# Altium PCB stm32f042g6u6andf6u6.PcbDoc
Units mil, origin at the board's own origin, x right, y up, seen from the top; angles counter-clockwise.
Board outline 650 x 1500 mil, 2 copper layers (Top Layer, Bottom Layer); 22 components, 34 nets, 140 pads, 57 vias.
Unrouted connection lines stored in the file: 1.
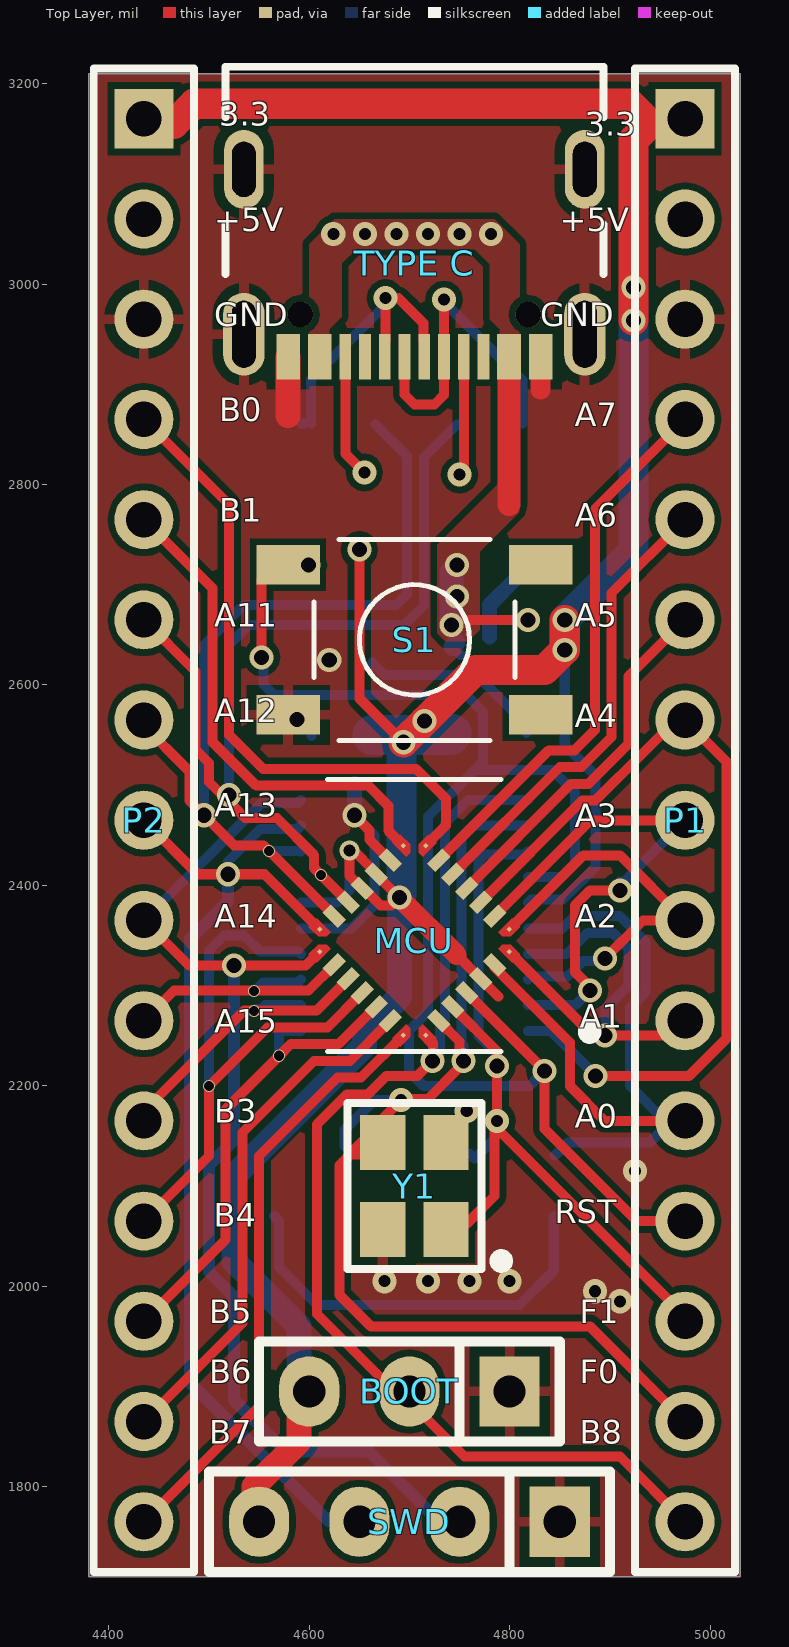
[diagram p0: Top Layer view]
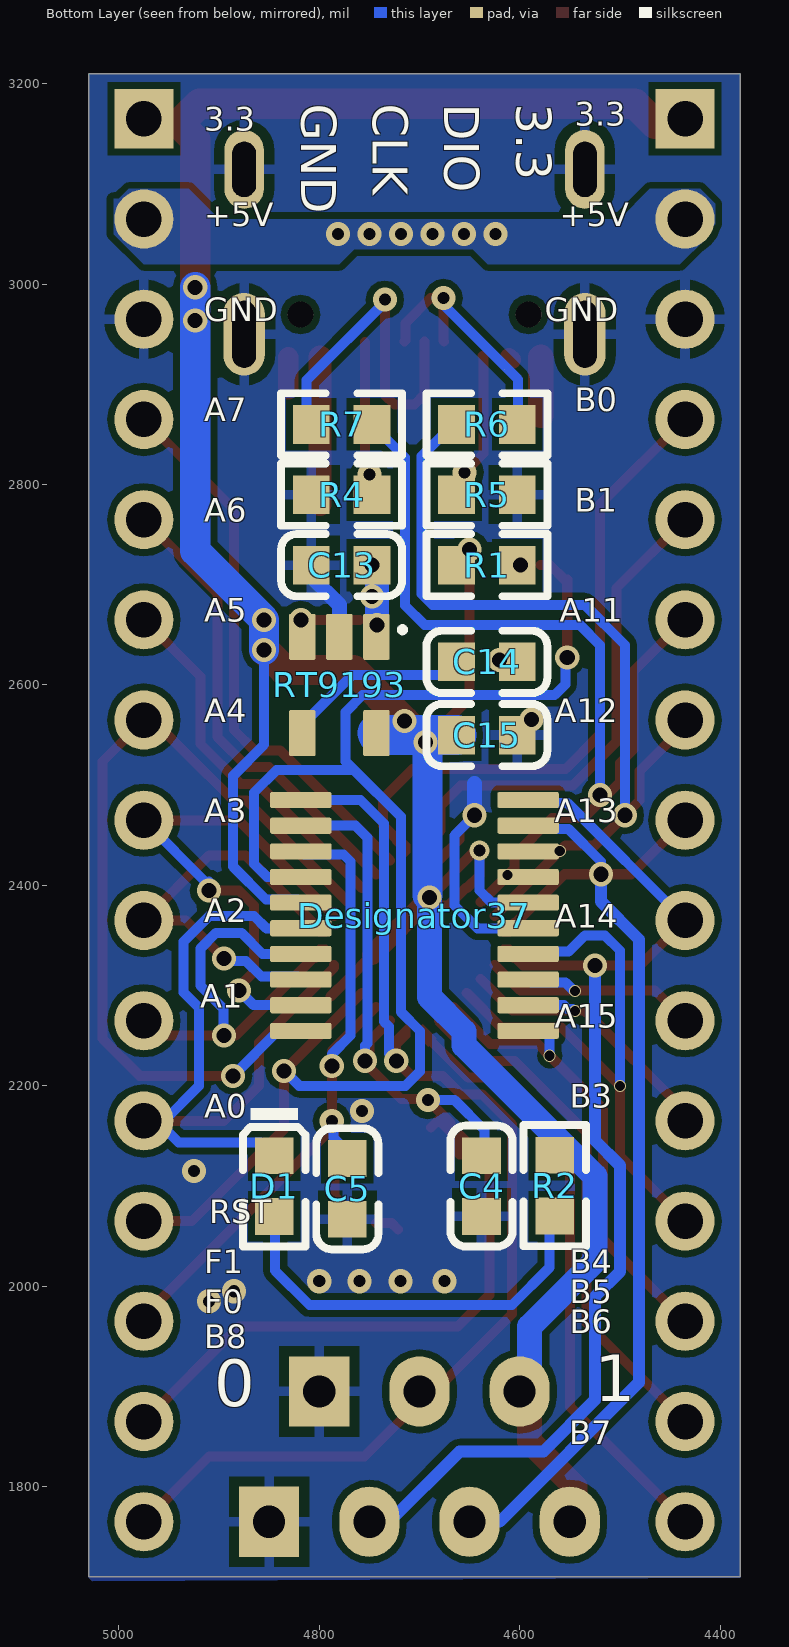
[diagram p1: Bottom Layer view, seen from below]

## Layer stack, top to bottom
Top Solder: solder mask 0.4, Solder Resist, Dk 3.5
Top Layer: signal copper 1.4
Dielectric 1: dielectric 12.6, FR-4, Dk 4.8
Bottom Layer: signal copper 1.4
Bottom Solder: solder mask 0.4, Solder Resist, Dk 3.5

## Board outline
4380,1710 4380,3210 5030,3210 5030,1710
cut-out: 4615,2915

## Design rules (kind name [scope] priority, off if disabled: settings)
Clearance [All] p1: gap=6.7 ignorepadtopadclearanceinfootprint=FALSE except(0: Arc-Hole Track-Hole SMDPad-Hole THPad-Hole Via-Hole Fill-Hole Poly-Hole Region-Hole Text-Hole)
PolygonConnect 666 [All vs IsNamedPolygon('Top Layer-GND')] p1: connectstyle=Direct reliefconductorwidth=10 reliefentries=4 polygonreliefangle="90 Angle" airgapwidth=10
PolygonConnect bb [All vs IsNamedPolygon('GND_L02_P015') Or  IsNamedPolygon('GND_L01_P014')] p2: thpad.connectstyle=Relief thpad.reliefconductorwidth=10 thpad.reliefentries=4 thpad.polygonreliefangle="90 Angle" thpad.airgapwidth=10 smdpad.connectstyle=Relief smdpad.reliefconductorwidth=10 smdpad.reliefentries=4 smdpad.polygonreliefangle="90 Angle" smdpad.airgapwidth=10 via.connectstyle=Direct via.reliefconductorwidth=10 via.reliefentries=4 via.polygonreliefangle="90 Angle" via.airgapwidth=10
PolygonConnect 5v [All vs IsNamedPolygon('+5_L01_P000') Or  IsNamedPolygon('+5_L02_P001')] p3: connectstyle=Direct reliefconductorwidth=10 reliefentries=4 polygonreliefangle="90 Angle" airgapwidth=10
PolygonConnect [All] p4: connectstyle=Direct reliefconductorwidth=10 reliefentries=4 polygonreliefangle="90 Angle" airgapwidth=10
RoutingVias [All] p1: holewidth=12 width=24 viastyle="Through Hole" minholewidth=10 minwidth=20 maxholewidth=20 maxwidth=30
SolderMaskExpansion [All] p1: expansion=4
Width [All] p1: maxlimit=50 minlimit=10 preferedwidth=10 minimp=50.000000 maximp=50.000000 favimp=50.000000
30 further rules are at their usual default settings.

## Classes and differential pairs
component class Sheet1: BOOT C4 C5 C13 C14 C15 D1 MCU P2 R1 R2 R4 R5 R6 R7 RT9193 S1 SWD "TYPE C" Y1

## Components (designator, comment, footprint, x,y, rotation, side; value= is the part's Value field where it differs from the comment)
BOOT "Pin HDR1X3" "Pin HDR1X3/2.54mm-S" 4800,1895 r270 top
C4 "15nF" 0603_C 4638.07,2100 r270 bottom
C5 "15nF" 0603_C 4771.93,2097.24 r270 bottom
C13 "1uF" 0603_C 4777.72,2719.61 r180 bottom
C14 "22nF" 0603_C 4632.72,2623.03 r0 bottom
C15 "1uf" 0603_C 4632.72,2550 r0 bottom
D1 "蓝灯 0603" 0603_LED_S1 4845,2100 r270 bottom
Designator37 "Comment" SOP65P640X120-20N 4705,2370 r180 bottom
MCU "ARM庐 Cortex庐-M0 STM32F0 Microcontroller IC 32-Bit 48MHz 32KB (32K x 8) FLASH 28-UFQFPN (4x4) Check prices" IC_STM32F042G6U6TR 4705,2345 r135 top
P1 "Pin HDR1X15" "Pin HDR1X15/2.54mm-S" 4975,3165 r270 top
P2 "Pin HDR1X15" "Pin HDR1X15/2.54mm-S" 4435,3165 r270 top
R1 "1KΩ" 0603_R 4632.72,2719.61 r0 bottom
R2 "200Ω (2000) ±1%" 0603_R 4565,2100.32 r270 bottom
R4 "5.1KΩ" 0603_R 4777.72,2790 r0 bottom
R5 "5.1KΩ" 0603_R 4632.72,2790 r180 bottom
R6 "22Ω (22R0) ±1%" 0603_R 4632.72,2860 r0 bottom
R7 "22Ω (22R0) ±1%" 0603_R 4777.72,2860 r180 bottom
RT9193 "RT9193-18GB" SOT94P279X129-5N 4779.92,2600 r270 bottom
S1 "PTS525SM15SMTR2LFS" SW_PTS525SM15SMTR2LFS 4705,2645 r0 top
SWD "Pin HDR1X4" "Pin HDR1X4/2.54mm-S" 4850,1765 r270 top
"TYPE C" "USB4105-GF-A" GCT_USB4105-GF-A 4704.92,3114.57 r180 top
Y1 "16MHZ" SMD-3225_4P 4705,2100 r90 top

## Footprints (in the part's own frame and the unit in brackets; to place one, negate y for a bottom-side part, rotate by r counter-clockwise, add the part's x,y. Pads: shape width x height; smd on the part's side, far side on the other; paste and mask are expansions set on the pad)
0603_C [mm]
  rect 0.93x0.98 smd: 1(-0.77,0) 2(0.77,0)
  silkscreen extent -1.53,-0.79 1.54,0.79, body extent -0.8,-0.4 0.8,0.4, height 0.3
0603_LED_S1 [mm]
  rect 0.93x0.98 smd: A(0.77,0) K(-0.77,0)
  silkscreen extent -1.97,-0.79 1.54,0.79, body extent -0.8,-0.4 0.8,0.4, height 0.6
0603_R [mm]
  rect 0.93x0.98 smd: 1(-0.77,0) 2(0.77,0)
  silkscreen extent -1.53,-0.79 1.54,0.79, body extent -0.85,-0.4 0.85,0.4, height 0.56
GCT_USB4105-GF-A [mm]
  rect 0.6x1.15 smd: A1/B12(-3.2,4.755) A4/B9(-2.4,4.755) B1/A12(3.2,4.755) B4/A9(2.4,4.755)
  rect 0.3x1.15 smd: A5(-1.25,4.755) A6(-0.25,4.755) A7(0.25,4.755) A8(1.25,4.755) B5(1.75,4.755) B6(0.75,4.755) B7(-0.75,4.755) B8(-1.75,4.755)
  oval 1x2 hole 0.6 slot 1.4 at 90 deg: G1(-4.32,0) G2(4.32,0)
  oval 1.05x2.1 hole 0.6 slot 1.7 at 90 deg: G3(-4.32,4.18) G4(4.32,4.18)
  round 0.65 hole 0.65 unplated: ""(-2.89,3.68) ""(2.89,3.68)
  silkscreen extent -4.79,-2.6 4.79,2.65
IC_STM32F042G6U6TR [mm]
  rect 0.1x0.1 smd paste+0 mask+0: 1(-1.9,1.5) 7(-1.9,-1.5) 8(-1.5,-1.9) 14(1.5,-1.9) 15(1.9,-1.5) 21(1.9,1.5) 22(1.5,1.9) 28(-1.5,1.9)
  rect 0.55x0.3 smd: 2(-1.875,1) 3(-1.875,0.5) 4(-1.875,0) 5(-1.875,-0.5) 6(-1.875,-1) 16(1.875,-1) 17(1.875,-0.5) 18(1.875,0) 19(1.875,0.5) 20(1.875,1)
  rect 0.3x0.55 smd: 9(-1,-1.875) 10(-0.5,-1.875) 11(0,-1.875) 12(0.5,-1.875) 13(1,-1.875) 23(1,1.875) 24(0.5,1.875) 25(0,1.875) 26(-0.5,1.875) 27(-1,1.875)
  Top Layer region: -2.15,1.65 -2.15,1.35 -1.65,1.35 -1.65,1.5 -1.8,1.65 -2.15,1.65
  Top Layer region: -2.15,-1.35 -2.15,-1.65 -1.8,-1.65 -1.65,-1.5 -1.65,-1.35 -2.15,-1.35
  Top Layer region: -1.65,-2.15 -1.35,-2.15 -1.35,-1.65 -1.5,-1.65 -1.65,-1.8 -1.65,-2.15
  Top Layer region: 1.35,-2.15 1.65,-2.15 1.65,-1.8 1.5,-1.65 1.35,-1.65 1.35,-2.15
  Top Layer region: 2.15,-1.65 2.15,-1.35 1.65,-1.35 1.65,-1.5 1.8,-1.65 2.15,-1.65
  Top Layer region: 2.15,1.35 2.15,1.65 1.8,1.65 1.65,1.5 1.65,1.35 2.15,1.35
  Top Layer region: 1.65,2.15 1.35,2.15 1.35,1.65 1.5,1.65 1.65,1.8 1.65,2.15
  Top Layer region: -1.35,2.15 -1.65,2.15 -1.65,1.8 -1.5,1.65 -1.35,1.65 -1.35,2.15
"Pin HDR1X3/2.54mm-S" [mil]
  rect 70x60 hole 32: 1(0,0)
  oval 70x60 hole 32: 2(0,-100) 3(0,-200)
  silkscreen extent -50,-250 50,50, body extent -50,-250 50,50, height 336
"Pin HDR1X4/2.54mm-S" [mil]
  rect 70x60 hole 32: 1(0,0)
  oval 70x60 hole 32: 2(0,-100) 3(0,-200) 4(0,-300)
  silkscreen extent -50,-350 50,50, body extent -50,-350 50,50, height 336
"Pin HDR1X15/2.54mm-S" [mm] "Connector; Header; 15 Position"
  rect 1.5x1.5 hole 0.9: 1(0,0)
  round 1.5 hole 0.9: 2(2.54,0) 3(5.08,0) 4(7.62,0) 5(10.16,0) 6(12.7,0) 7(15.24,0) 8(17.78,0) 9(20.32,0) 10(22.86,0) 11(25.4,0) 12(27.94,0) 13(30.48,0) 14(33.02,0) 15(35.56,0)
  silkscreen extent -1.27,-1.27 36.83,1.27, body extent -1.27,-1.27 36.83,1.27, height 7.58
SMD-3225_4P [mm]
  rect 1.4x1.15 smd: 1(-1.1,-0.8) 2(1.1,-0.8) 3(1.1,0.8) 4(-1.1,0.8)
  silkscreen extent -2.1,-2.35 2.1,1.7, body extent -1.6,-1.25 1.6,1.25, height 0.61
SOP65P640X120-20N [mm]
  rrect25% 1.56x0.41 smd: 1(-2.88,-2.925) 2(-2.88,-2.275) 3(-2.88,-1.625) 4(-2.88,-0.975) 5(-2.88,-0.325) 6(-2.88,0.325) 7(-2.88,0.975) 8(-2.88,1.625) 9(-2.88,2.275) 10(-2.88,2.925) 11(2.88,2.925) 12(2.88,2.275) 13(2.88,1.625) 14(2.88,0.975) 15(2.88,0.325) 16(2.88,-0.325) 17(2.88,-0.975) 18(2.88,-1.625) 19(2.88,-2.275) 20(2.88,-2.925)
SOT94P279X129-5N [mm]
  rrect12% 1.17x0.67 smd: 1(-1.22,0.94) 2(-1.22,0) 3(-1.22,-0.94) 4(1.22,-0.94) 5(1.22,0.94)
  silkscreen extent -1.47,1.53 -1.33,1.67
SW_PTS525SM15SMTR2LFS [mm]
  rect 1.6x1 smd: 1(-3.2,1.9) 2(3.2,1.9) 3(-3.2,-1.9) 4(3.2,-1.9)
  silkscreen extent -2.55,-2.55 2.55,2.55, body extent -3.2,-2.55 3.2,2.55, height 1.6

## Part data
C4 C5: library part "0603 15nF (153) 10% 50V", "贴片电容", Package=0603, SuppliersPartNumber=C1596, ComponentLink1Description=¹©Ó, ComponentLink1URL=http://www.szlcsc.com/product/details_1948.html, Supplier=LC
C13 C14 C15: library part "0603 1uF (105) 10% 50V", "贴片电容", Package=0603, SuppliersPartNumber=C15849, ComponentLink1Description=¹©Ó, ComponentLink1URL=http://www.szlcsc.com/product/details_16531.html, Supplier=LC
D1: library part "0603 蓝灯", "发光二极管", Package=0603, SuppliersPartNumber=C72041, ComponentLink1Description=¹©Ó, ComponentLink1URL=http://www.szlcsc.com/product/details_73150.html, Supplier=LC
MCU: library part STM32F042G6U6TR, Package="UFQFN-28 STMicroelectronics", Availability=Warning, DeviceSetName=STM32F042G6U6TR, GateName_1=G$1, LibraryName=STM32F042G6U6TR, MF=STMicroelectronics, MP=STM32F042G6U6TR, Price=None, Purchase-URL=https://pricing.snapeda.com/search/part/STM32F042G6U6TR/?ref=eda, SymbolName_1=STM32F042G6U6TR
R1: library part "0603 1.1KΩ (1101) 1%", "贴片电阻", Package=0603, SuppliersPartNumber=C22764, ComponentLink1Description=¹©Ó, ComponentLink1URL=http://www.szlcsc.com/product/details_23491.html, Supplier=LC
R2: library part "0603 200Ω (2000) 1%", "贴片电阻", Package=0603, SuppliersPartNumber=C8218, ComponentLink1Description=¹©Ó, ComponentLink1URL=http://www.szlcsc.com/product/details_8708.html, Supplier=LC
R4 R5: library part "0603 5.1KΩ (5101) 1%", "贴片电阻", Package=0603, SuppliersPartNumber=C23186, ComponentLink1Description=¹©Ó, ComponentLink1URL=http://www.szlcsc.com/product/details_23913.html, Supplier=LC
R6 R7: library part "0603 22Ω (22R0) 1%", "贴片电阻", Package=0603, SuppliersPartNumber=C23345, ComponentLink1Description=¹©Ó, ComponentLink1URL=http://www.szlcsc.com/product/details_24078.html, Supplier=LC
RT9193: Package=None, Availability=Unavailable, MF="{'manufacturer': u'Richtek USA'}", MP=RT9193-18GB, Price=None
S1: "Switch Tactile N.O. SPST Round Button Gull Wing 0.02A 15VDC 1000000Cycles 1.569N SMD T/R", Package=None, Availability=Unavailable, MF="{'manufacturer': u'C'}", MP=PTS525SM15SMTR2LFS, Price=None
"TYPE C": "USB Type C Receptacle for USB 2.0 SMT Type, PCB Top Mount", Package=None, Availability=Unavailable, MF="{'manufacturer': u'GCT'}", MP=USB4105-GF-A, Price=None
Y1: library part "SMD-3225_4P  16MHZ 9PF 10PPM", "贴片晶振", Package=SMD-3225_4P, SuppliersPartNumber=C13738, ComponentLink1Description=¹©Ó, ComponentLink1URL=http://www.szlcsc.com/product/details_14393.html, Supplier=LC

## Via types
v1: diameter 24, hole 15, Top Layer to Bottom Layer, tented both sides, 30 vias
v2: diameter 24, hole 12, Top Layer to Bottom Layer, tented both sides, 20 vias
v3: diameter 12, hole 10, Top Layer to Bottom Layer, tented both sides, 6 vias
v4: diameter 20, hole 12, Top Layer to Bottom Layer, tented both sides, 1 vias

## Nets (pads, with @x,y where several pads share a name; then routed paths per layer and width w, separated by ;. In a path a pad name is that pad's centre, name@x,y a point inside that pad or via, vN(x,y) a via of type N, cw(c..) or ccw(c..) an arc to the next point about the centre after c; other vN are vias at no path point)
+5: "TYPE C.A4/B9" "TYPE C.B4/A9" C13.2 P1.2 P2.2 RT9193.1 RT9193.3 | length 298.9
  Top Layer w10: 4760,2665 v1(4818.39,2665)
  Top Layer w18: 4607.62,2924.55 4610.43,2927.36
  Top Layer w23: 4799.41,2780 4799.41,2927.36
  Bottom Layer w10: C13.2@4742.2,2712.2 4747.41,2717.41 v1(4747.41,2719.61) ; RT9193.1 4742.91,2638.03 4743.07,2638.03 RT9193.1@4751.1,2630
  Bottom Layer w18: RT9193.1@4742.99,2638.03 RT9193.1@4747.18,2642.22
  Bottom Layer w24: v1(4742.2,2660) C13.2@4742.2,2712.2
  other v1: 4747.5,2688.5
  other v2: 4624,3050 4655.5,3050 4687,3050 4718.5,3050 4750,3050 4781.5,3050
GND: "TYPE C.A1/B12" "TYPE C.B1/A12" "TYPE C.G1" "TYPE C.G2" "TYPE C.G3" "TYPE C.G4" BOOT.1 C4.2 C5.2 C13.1 C14.1 C15.1 P1.3 P2.3 R4.2 R5.2 RT9193.2 S1.3 SWD.1 Y1.2 Y1.4 | length 207.5
  Top Layer w10: 4578.56,2926.99 4578.94,2927.36
  Top Layer w20: 4830.91,2894.88 4830.91,2927.36
  Top Layer w25: 4578.94,2868.94 4578.94,2927.36
  Bottom Layer w10: C15.1@4602.41,2549.02 C15.1 ; C13.1@4808.04,2708.04 C13.1
  Bottom Layer w15: v1(4645,2470) 4645,2501.89 ; RT9193.2 4779.92,2679.92 C13.1@4808.04,2708.04
  other v1: 4588.04,2565.35 4620,2625
  other v2: 4910,1985 4885,1995 4675,2005 4718.69,2005 4760,2005 4800,2005 4925,2115 4757.2,2175
NetC14_2: C14.2 RT9193.4 | length 188.7
  Bottom Layer w10: C14.2 4663.04,2622.05 4675.08,2610 4767.16,2610 4816.93,2560.23 RT9193.4
NetD1_A: D1.A R2.2 | length 412.1
  Bottom Layer w10: R2.2 4570,2065 4570,2018.94 4607.64,1981.3 4809.82,1981.3 4844.02,2015.5 4844.02,2069.68 D1.A
NetR4_1: "TYPE C.A5" R4.1 | length 133.1
  Top Layer w10: 4754.13,2927.36 4754.57,2927.8 ; v2@4754.57,2810 4754.57,2927.8 ; 4754.57,2942.44 4754.57,2927.8
  other v2: 4750,2810
NetR5_1: "TYPE C.B5" R5.1 | length 124.5
  Top Layer w10: 4636.93,2928.27 4636.02,2927.36 4636.02,2831.02 v2(4655,2812.05)
NetR6_1: "TYPE C.A6" "TYPE C.B6" R6.1 | length 271.8
  Top Layer w10: 4675.47,2942.8 4676.08,2943.41 v2(4676.08,2986.08) 4688.92,2986.08 4713.94,2961.06 4713.94,2943.7 4714.84,2942.8
  Bottom Layer w10: R6.1@4592.12,2861.13 R6.1@4595.03,2861.13 ; R6.1@4601.75,2861.13 4601.75,2905.03 v2@4682.81,2986.08
NetR7_1: "TYPE C.A7" "TYPE C.B7" R7.1 | length 353.1
  Top Layer w10: 4695.16,2942.8 4695.16,2889.84 4705,2880 4725,2880 4734.53,2889.53 v2(4734.53,2984.53)
  Bottom Layer w10: v2@4731.72,2985 4812.6,2904.12 R7.1@4812.6,2860.75
NRST: Designator37.7 MCU.4 P1.12 R1.1 S1.1 | length 1484.3
  Top Layer w10: v1(4552.52,2627.52) 4552.52,2705.12 4555,2705.12 4569.69,2719.8 S1.1 ; MCU.4 v1(4835,2215) 4835,2156.85 4926.85,2065 P1.12
  Bottom Layer w10: v1(4552.52,2627.52) 4554.48,2625.56 4554.48,2600.52 4565,2590 4756.72,2590 4773.61,2573.11 4773.61,2523.61 4765,2515 ; Designator37.7 4851.91,2408.39 4865,2421.48 4865,2492.69 4842.69,2515 4765,2515 ; v1(4835,2215) 4820,2200 4713.87,2200 4699.43,2214.44 4699.43,2254.67 4718.64,2273.88 4718.64,2468.64 4765,2515
  other v1: 4599.26,2719.61
PA0: D1.K Designator37.5 MCU.6 P1.11 | length 764.6
  Top Layer w10: MCU.6 4785.04,2318.13 4860,2243.16 4860,2200 4895,2165 P1.11
  Bottom Layer w10: Designator37.5 4852.84,2357.2 4865,2369.36 4909.82,2369.36 4935.4,2343.78 4935.4,2293.27 4920,2277.87 4920,2200 4955,2165 P1.11@4961.73,2165 ; D1.K 4858.31,2143.62 4940.35,2143.62 4958.36,2161.64 P1.11@4961.73,2165 ; P1.11 P1.11@4961.73,2165
PA1: Designator37.4 MCU.7 P1.10 | length 422.3
  Top Layer w10: MCU.7 4883.52,2250 v1(4895,2250) P1.10@4975,2250
  Bottom Layer w10: Designator37.4 4856.61,2331.61 4877.66,2352.66 4902.9,2352.66 4918.7,2336.86 4918.7,2300.18 4895.52,2277 4895.52,2250.52 v1(4895,2250)
PA2: Designator37.3 MCU.8 P1.9 | length 413.9
  Top Layer w10: MCU.8 4873.52,2430 4910,2430 P1.9 4932.95,2365 v1(4895,2327.05)
  Bottom Layer w10: Designator37.3 4821.46,2309.09 4857.71,2309.09 4872.99,2324.37 4892.32,2324.37 v1(4895,2327.05)
PA3: Designator37.2 MCU.9 P1.8 | length 540.6
  Top Layer w10: MCU.9 4880.68,2465 P1.8 ; v1(4880,2295) 4880,2298.79 4865,2313.79 4865,2380 4880,2395 v1(4910,2395)
  Bottom Layer w10: Designator37.2 4865.43,2280.43 v1(4880,2295) ; v1(4910,2395) 4910,2404 4912,2402 P1.8
PA4: Designator37.1 MCU.10 P1.7 | length 845.9
  Top Layer w10: MCU.10 4872.51,2484.66 4885.52,2484.66 4935.1,2534.25 4965.85,2565 P1.7 5016.23,2523.77 5016.23,2247.09 4979.14,2210 v1(4885.87,2210)
  Bottom Layer w10: Designator37.1 4841.02,2254.84 v1(4885.87,2210)
PA5: MCU.11 P1.6 | length 368.1
  Top Layer w10: MCU.11 4861.36,2501.36 4878.6,2501.36 4918.4,2541.17 4918.4,2608.4 P1.6
PA6: MCU.12 P1.5 | length 462.4
  Top Layer w10: MCU.12 4850.22,2518.06 4871.68,2518.06 4901.7,2548.08 4901.7,2691.7 P1.5
PA7: MCU.13 P1.4 | length 556.8
  Top Layer w10: MCU.13 4839.09,2534.76 4864.76,2534.76 4885,2555 4885,2775 P1.4
PA11: Designator37.14 MCU.19 P2.6 R7.2 | length 939.7
  Top Layer w10: P2.6 4486.6,2613.4 4486.6,2535.55 4500,2522.15 4500,2503.3 4536.15,2467.15 4567.85,2467.15 4605,2430 4605,2417.15 v3(4611.98,2410.17) MCU.19
  Bottom Layer w10: v1(4520,2490) 4520,2640 4540,2660 4695,2660 4714.42,2679.42 4714.42,2827.02 R7.2
PA12: Designator37.13 MCU.20 P2.7 R6.2 | length 897.5
  Top Layer w10: P2.7@4432.16,2562.16 4480.36,2513.96 4480.36,2484.64 v1(4495,2470) 4525,2440 4554.32,2440 v3(4560,2434.32) MCU.20
  Bottom Layer w10: v1@4495.31,2470.31 4495,2470.62 4495,2640 4535,2680 4687,2680 4697.72,2690.72 4697.72,2828.46 R6.2@4666.19,2860 ; v3(4560,2434.32) 4560.17,2434.15 4591.44,2434.15 Designator37.13
PA13: Designator37.12 MCU.21 P2.8 SWD.3 | length 1050
  Top Layer w10: P2.8 4488.88,2411.12 v1(4518.88,2411.12) 4555.35,2411.12 MCU.21
  Bottom Layer w10: v1(4518.88,2411.12) 4518.88,2423.88 4551.5,2456.5 4588.54,2456.5 Designator37.12
  Bottom Layer w12: v1(4518.88,2411.12) 4518.88,2383.88 4481.1,2346.1 4481.1,1903.9 4620,1765 SWD.3@4630,1765
PA14: Designator37.11 MCU.22 P2.9 SWD.2 | length 1115.9
  Top Layer w10: P2.9 4480,2320 v1(4525,2320) 4596.48,2320 MCU.22
  Bottom Layer w10: P2.9 4552.09,2482.09 4588.54,2482.09 Designator37.11
  Bottom Layer w12: v1(4525,2320) 4525,2145.64 4499.8,2120.44 4499.8,2014.56 4525,1989.36 4525,1886.45 4576.45,1835 4660,1835 SWD.2@4730,1765
PA15: Designator37.18 MCU.23 P2.10 | length 264.4
  Top Layer w10: P2.10 4465,2295 4599.32,2295 MCU.23
  Bottom Layer w10: v3(4545,2294.46) 4545.54,2294.46 4554.04,2302.95 4588.54,2302.95 Designator37.18
PB0: MCU.14 P2.4 | length 648.1
  Top Layer w10: P2.4 4520,2780 4520,2550.25 4554.09,2516.16 4706.79,2516.16 4736.48,2486.48 4736.48,2460 MCU.14
PB1: MCU.15 P2.5 | length 498.1
  Top Layer w10: P2.5 4503.3,2696.7 4503.3,2543.33 4547.17,2499.46 4659.05,2499.46 4678.92,2479.59 4678.92,2454.6 MCU.15
PB3: Designator37.19 MCU.24 P2.11 | length 317.5
  Top Layer w10: P2.11 4435,2175 4535,2275 4607.15,2275 MCU.24
  Bottom Layer w10: v3(4545,2274.46) 4547.3,2276.76 4552.33,2276.76 4556.01,2280.43 Designator37.19
PB4: Designator37.17 MCU.25 P2.12 | length 593.6
  Top Layer w10: P2.12 4499.9,2129.9 v3(4499.9,2199.9) 4558.3,2258.3 4618.3,2258.3 MCU.25
  Bottom Layer w10: v3@4500,2200 4500,2335 4515,2350 4535,2350 4551.17,2333.83 4589.4,2333.83 Designator37.17
PB5: Designator37.20 MCU.26 P2.13 | length 482.5
  Top Layer w10: P2.13 4516.6,2046.6 4516.6,2176.6 v3(4570,2230) 4581.6,2241.6 4629.45,2241.6 MCU.26
  Bottom Layer w10: v3(4570,2230) 4570,2251.77 4573.07,2254.84 Designator37.20
PB6: MCU.27 P2.14 | length 522.6
  Top Layer w10: P2.14 4533.3,1963.3 4533.3,2153.3 4604.9,2224.9 4640.58,2224.9 MCU.27
PB7: MCU.28 P2.15 | length 606.4
  Top Layer w10: P2.15 4550,1880 4550,2130 4628.2,2208.2 4651.72,2208.2 MCU.28
PB8: BOOT.2 Designator37.10 MCU.1 P1.15 | length 1146.8
  Top Layer w10: MCU.1 4723.51,2242.97 4723.51,2225.38 v1(4723.13,2225) 4708.13,2210 4677.14,2210 4658.64,2191.5 4637.6,2191.5 4607.64,2161.53 4607.64,1972.36 4690,1890 4695,1890 4755,1830 4910,1830 P1.15
  Bottom Layer w10: v1@4723.51,2225.38 4730.43,2232.3 4730.43,2259.08 4735.34,2263.98 4735.34,2461.72 4758.78,2485.16 Designator37.10
PF0: C4.1 Designator37.9 MCU.2 P1.14 Y1.3 | length 1196
  Top Layer w10: Y1.3@4668.85,2163.01 4675,2169.16 Y1.3@4677.69,2169.16 ; Y1.3@4688.43,2158.43 Y1.3@4680.93,2165.93 ; MCU.2 4750,2244.32 4750,2225 4750.82,2224.18 4750.82,2219.17 4718.49,2186.84 4692.68,2186.84 v2(4691.49,2185.65) 4676.35,2170.51 Y1.3@4677.69,2169.16 ; P1.14 4880,1960 4661.44,1960 4630,1991.44 4630,2120.51 4641.14,2131.66 ; 4641.14,2131.66 4660,2131.66 Y1.3@4660,2145 ; 4641.14,2131.66 4640.4,2131.66 4660,2151.26 Y1.3@4660,2145 ; Y1.3@4660,2145 Y1.3@4680.93,2165.93 ; Y1.3@4677.69,2169.16 Y1.3@4680.93,2165.93
  Bottom Layer w10: C4.1@4635,2140 4635,2155.82 4664.83,2185.65 v2(4691.49,2185.65) ; v1(4754.13,2225) 4754.13,2240.19 4752.04,2242.28 4752.04,2447.72 4763.89,2459.57 Designator37.9
PF1: C5.1 Designator37.8 MCU.3 P1.13 Y1.1 | length 855.5
  Top Layer w10: Y1.1@4721.5,2056.69 4728.08,2063.28 Y1.1@4743.28,2063.28 ; MCU.3 4787.5,2234.65 v1(4787.5,2220) v2(4787.5,2165) ; Y1.1@4758.28,2063.28 4785,2090 4785,2160 P1.13@4977.5,1967.5
  Bottom Layer w10: C5.1@4760,2132.24 4765,2127.24 4785.61,2147.86 v2@4785.61,2165 ; v1(4787.5,2220) 4787.5,2231.58 4768.74,2250.34 4768.74,2423.74 4775.91,2430.91 4815.31,2430.91 Designator37.8
VDD: BOOT.3 C15.2 Designator37.6 Designator37.15 MCU.5 MCU.17 MCU.18 P1.1 P2.1 R1.2 R2.1 RT9193.5 SWD.4 | length 3209.2
  Top Layer w10: v4(4640,2435) 4640,2410 MCU.18 4654.08,2397.2 4671.28,2380 4682.15,2380 v1(4690,2387.85) ; v4@4642.06,2437.06 4666.72,2412.4 MCU.17 v1@4689.57,2388.28 ; v1(4650,2735) 4650,2586.74 v1(4693.88,2542.86) ; 4747.15,2330.69 MCU.5 4788.92,2288.92
  Top Layer w20: v1(4690,2387.85) 4747.15,2330.69
  Top Layer w25: SWD.4@4545,1765 4545,1800 4590,1845 BOOT.3@4590,1885
  Top Layer w30: 4465,3160 4485,3180 4919.69,3180 4939.69,3160 4923.75,3144.06 v1(4923.75,2996.88) v1(4923.75,2963.75) ; v1(4693.88,2542.86) v1(4715,2563.98) 4766.02,2615 4835,2615 v1(4855,2635) v1(4855,2665)
  Bottom Layer w10: Designator37.15 4627.8,2382.8 4640,2395 v4(4640,2435) ; v1@4684.95,2382.8 v1(4690,2387.85) v1@4691.94,2389.79 ; v1@4691.94,2540.92 v1(4693.88,2542.86) ; Designator37.6 4821.46,2385.87 4853.01,2385.87 4885.86,2418.72 4885.86,2509.54 4855,2540.39 v1(4855,2635)
  Bottom Layer w25: BOOT.3@4590,1885 4590,1960 4525,2025 4525,2110 4655.34,2240.34 4655.34,2253.98 4690,2288.64 v1(4690,2387.85)
  Bottom Layer w30: v1@4691.94,2389.79 v1@4691.94,2540.92 ; v1(4855,2635) v1(4855,2665) 4923.75,2733.75 v1(4923.75,2963.75) v1(4923.75,2996.88)
  Bottom Layer w38: RT9193.5@4740.94,2550 RT9193.5
  Bottom Layer w40: C15.2 4715,2550 RT9193.5@4740.94,2550
VSS: Designator37.16 MCU.16 | length 240.8
  Top Layer w10: 4645,2470 4660,2455 4660,2445.68 MCU.16
  Bottom Layer w10: Designator37.16 4642.2,2357.2 4665,2380 4665,2450 4645,2470
pads on no net: "TYPE C." "TYPE C.A8" "TYPE C.B8" S1.2 S1.4

## Polygon pours and split planes (outlines as drawn)
+5 on Top Layer "+5_L01_P007" (solid, pour order 7): 4620,2955 4632.5,2967.5 4632.5,3020.78 4646.72,3035 4765,3035 4780,3020 4780,2965 4790,2955 4790,2910 4810,2910 4810,3040 4785,3065 4625,3065 4600,3040 4600,2930 4620,2930
+5 on Top Layer "+5_L01_P000" (solid, pour order 0): 4790,2802.32 4727.68,2740 4727.68,2651.77 4735.8,2643.65 4758.65,2643.65 4770,2655 4770,2733.07 4809.43,2772.5 4810,2887.99 4810,2920 4790,2920
GND on Top Layer "GND_L01_P014" (solid, pour order 14): 4380,3210 5030,3210 5030,1710 4380,1710
GND on Bottom Layer "GND_L02_P015" (solid, pour order 15): 4380,3210 5030,3210 5030,1705.59 4380,1709.27
GND on Bottom Layer "GND_L02_P012" (solid, pour order 12): 5390,2420
+5 on Bottom Layer "+5_L02_P008" (solid, pour order 8): 4975,3020 5005,3050 5005,3085 5000,3085 4990,3095 4930,3095 4900,3065 4500,3065 4470,3095 4420,3095 4405,3080 4405,3060 4415,3050 4415,3045 4440,3020 4459.71,3020 4631.73,3020 4646.72,3035 4765,3035 4780,3020
no net on Bottom Layer "NONET_L02_P005" (solid, pour order 5): 4600,2930
no net on Bottom Layer "NONET_L02_P004" (hatched 90Degree grid 20 track 8, pour order 4): 4600,2930
no net on Bottom Layer "NONET_L02_P003" (hatched 90Degree grid 20 track 8, pour order 3): 4600,2930
no net on Bottom Layer "NONET_L02_P002" (hatched 90Degree grid 20 track 8, pour order 2): 4600,2930

## Silkscreen, mask and mechanical layers (free items; w line width, h text height)
Top Overlay:
  text "3.3" at 4510,3150 h40
  text "3.3" at 4875,3140 h40
  text "+5V" at 4505,3045 h40
  text "+5V" at 4850,3045 h40
  text "GND" at 4505,2950 h40
  text "GND" at 4830.71,2950 h40
  text "B0" at 4510,2855 h40
  text "A7" at 4865,2850 h40
  text "B1" at 4510,2755 h40
  text "A6" at 4865,2750 h40
  text "A11" at 4505,2650 h40
  text "A5" at 4865,2650 h40
  text "A12" at 4505,2555 h40
  text "A4" at 4865,2550 h40
  text "A13" at 4505,2460.67 h40
  text "A3" at 4865,2450 h40
  text "A14" at 4505,2350 h40
  text "A2" at 4865,2350 h40
  text "A1" at 4870,2250 h40
  text "A15" at 4505,2245 h40
  text "B3" at 4505,2155 h40
  text "A0" at 4865,2150 h40
  text "RST" at 4845,2055 h40
  text "B4" at 4504.67,2051.54 h40
  text "B5" at 4500,1955 h40
  text "F1" at 4870,1955 h40
  text "B6" at 4500,1895 h40
  text "F0" at 4870,1895 h40
  text "B7" at 4500,1835 h40
  text "B8" at 4870,1835 h40
Bottom Overlay:
  text "3.3" at 4615,3180 h60 r90
  text "DIO" at 4686.75,3180 h60 r90
  text "CLK" at 4757.99,3180 h60 r90
  text "GND" at 4829.24,3180 h60 r90
  text "3.3" at 4545,3150 h40
  text "3.3" at 4915,3145 h40
  text "+5V" at 4560,3050 h40
  text "+5V" at 4915,3050 h40
  text "GND" at 4575,2955 h40
  text "GND" at 4915,2955 h40
  text "B0" at 4545,2865 h40
  text "A7" at 4915,2855 h40
  text "B1" at 4545,2765 h40
  text "A6" at 4915,2755 h40
  text "A11" at 4560,2655 h40
  text "A5" at 4915,2655 h40
  text "A12" at 4565,2555 h40
  text "A4" at 4915,2555 h40
  text "A13" at 4565,2455 h40
  text "A3" at 4915,2455 h40
  text "A2" at 4915,2355 h40
  text "A14" at 4565,2350 h40
  text "A1" at 4918.52,2270 h40
  text "A15" at 4565,2250 h40
  text "B3" at 4550,2170 h40
  text "A0" at 4915,2160 h40
  text "RST" at 4910,2055 h40
  text "B4" at 4550,2005 h40
  text "F1" at 4915,2005 h40
  text "B5" at 4550,1975 h40
  text "F0" at 4915,1965 h40
  text "B6" at 4550,1945 h40
  text "B8" at 4915,1930 h40
  text "1" at 4525,1870 h80
  text "0" at 4905,1865 h80
  text "B7" at 4550.55,1834.45 h40
Mechanical 1:
  the board outline again, w10